# Altium PCB MGMEZZ04TEST.PCBDOC (part 1 of 2)
Units mil, origin at the board's own origin, x right, y up, seen from the top; angles counter-clockwise.
Board outline 4922.86 x 3627.76 mil, 6 copper layers (Top Layer, Internal Plane 1, Mid-Layer 1, Internal Plane 2, Mid-Layer 2, Bottom Layer); 10 components, 606 nets, 200 pads, 150 vias.
Unrouted connection lines stored in the file: 9.
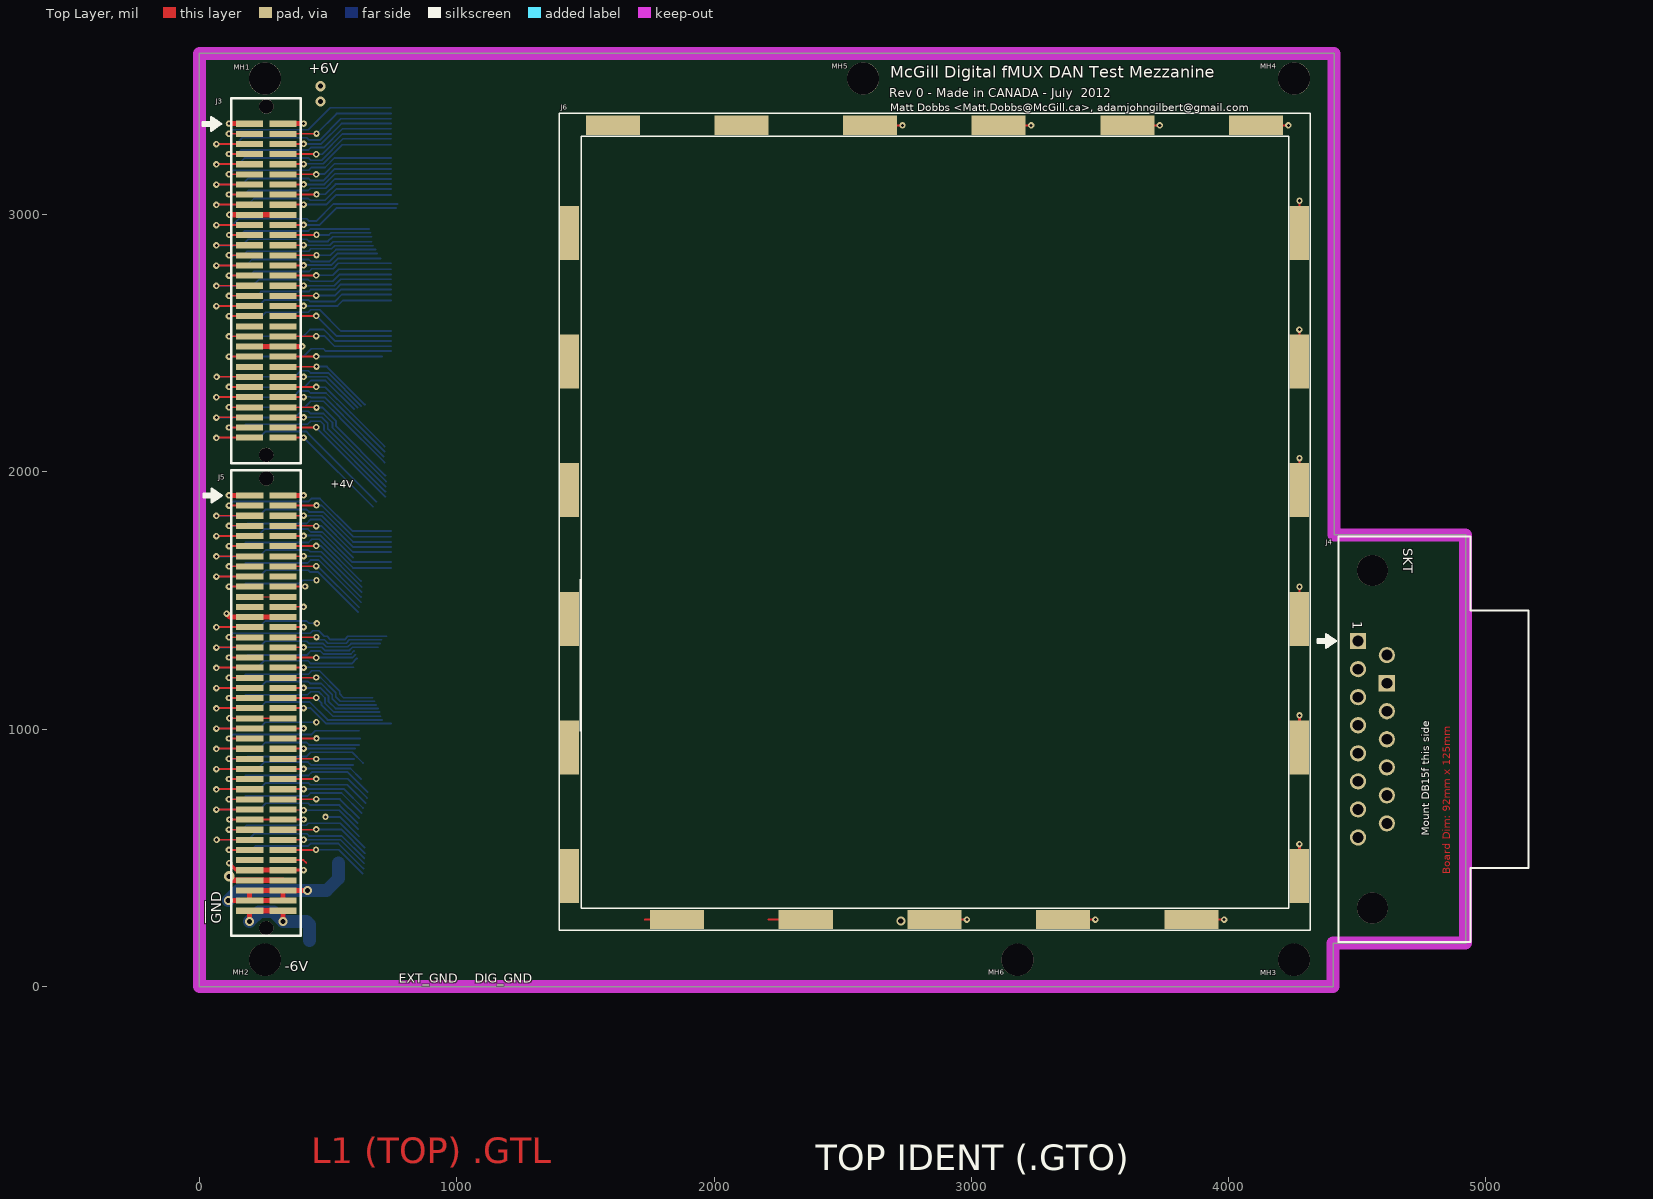
[diagram p0: Top Layer view]
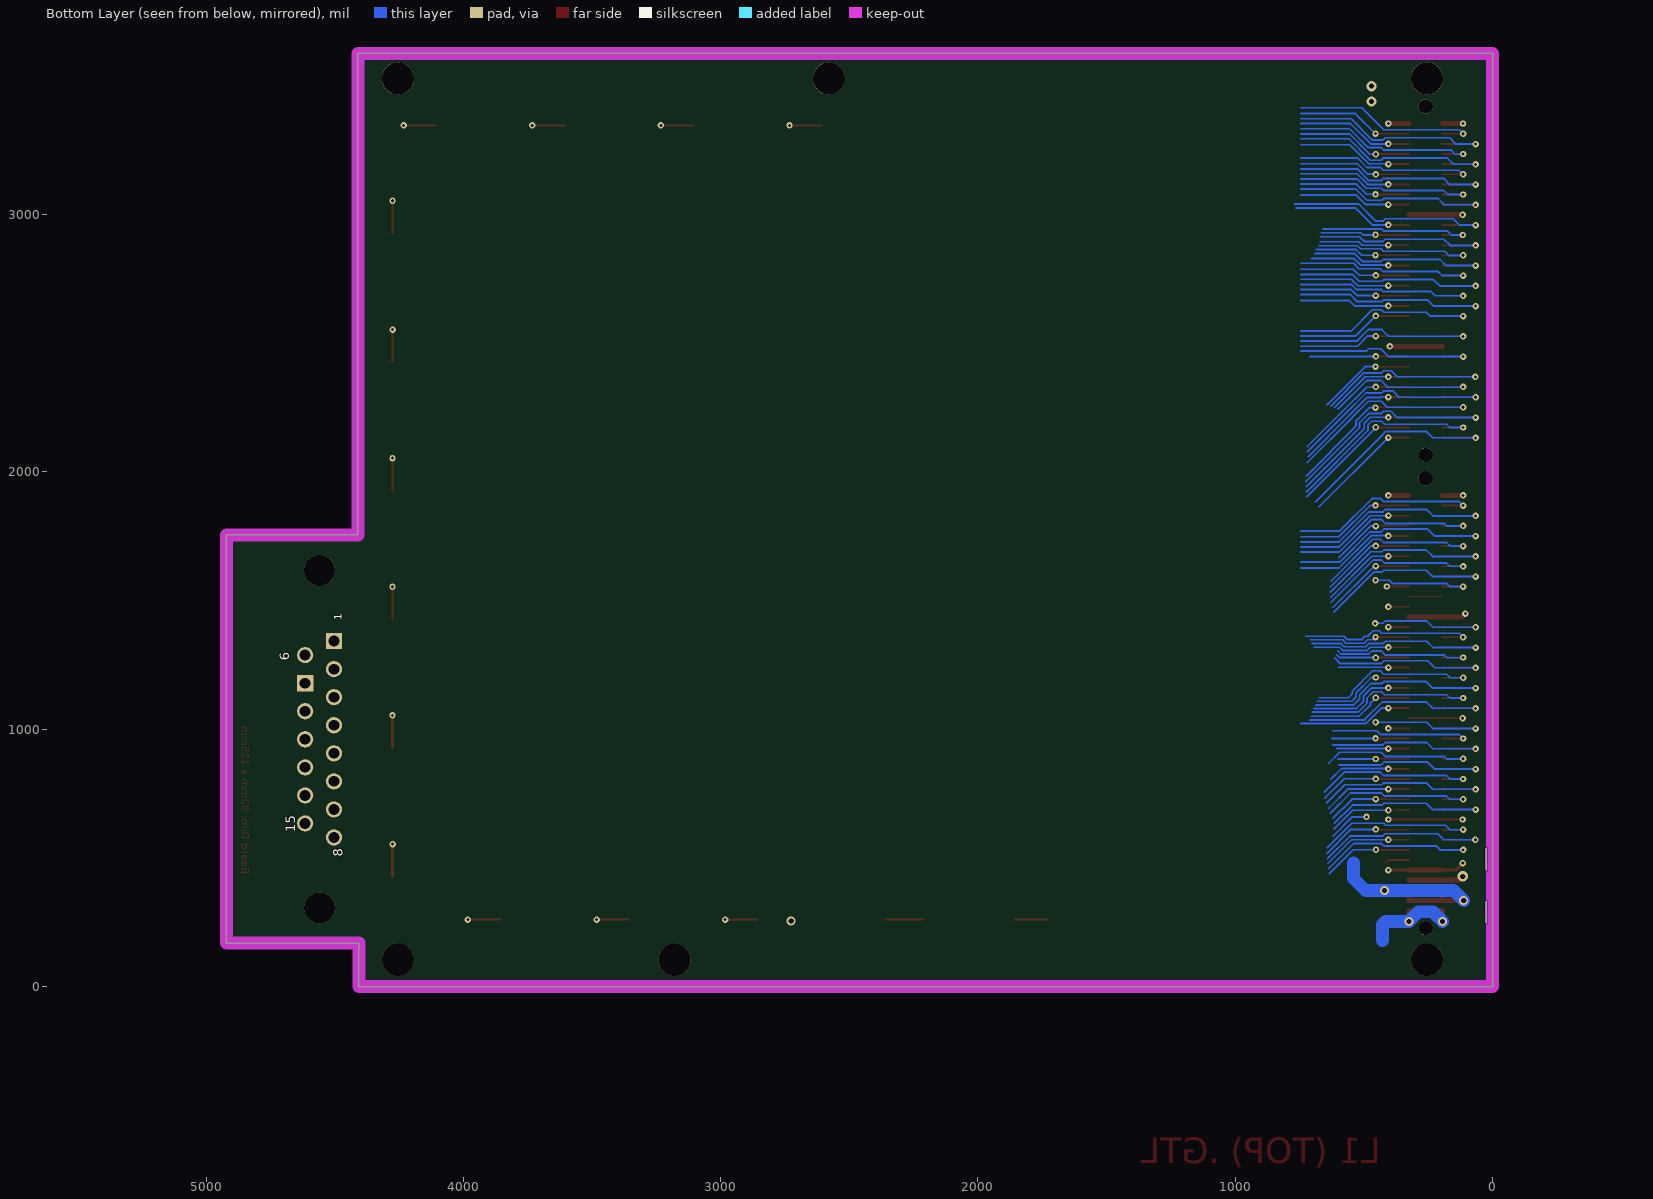
[diagram p1: Bottom Layer view, seen from below]
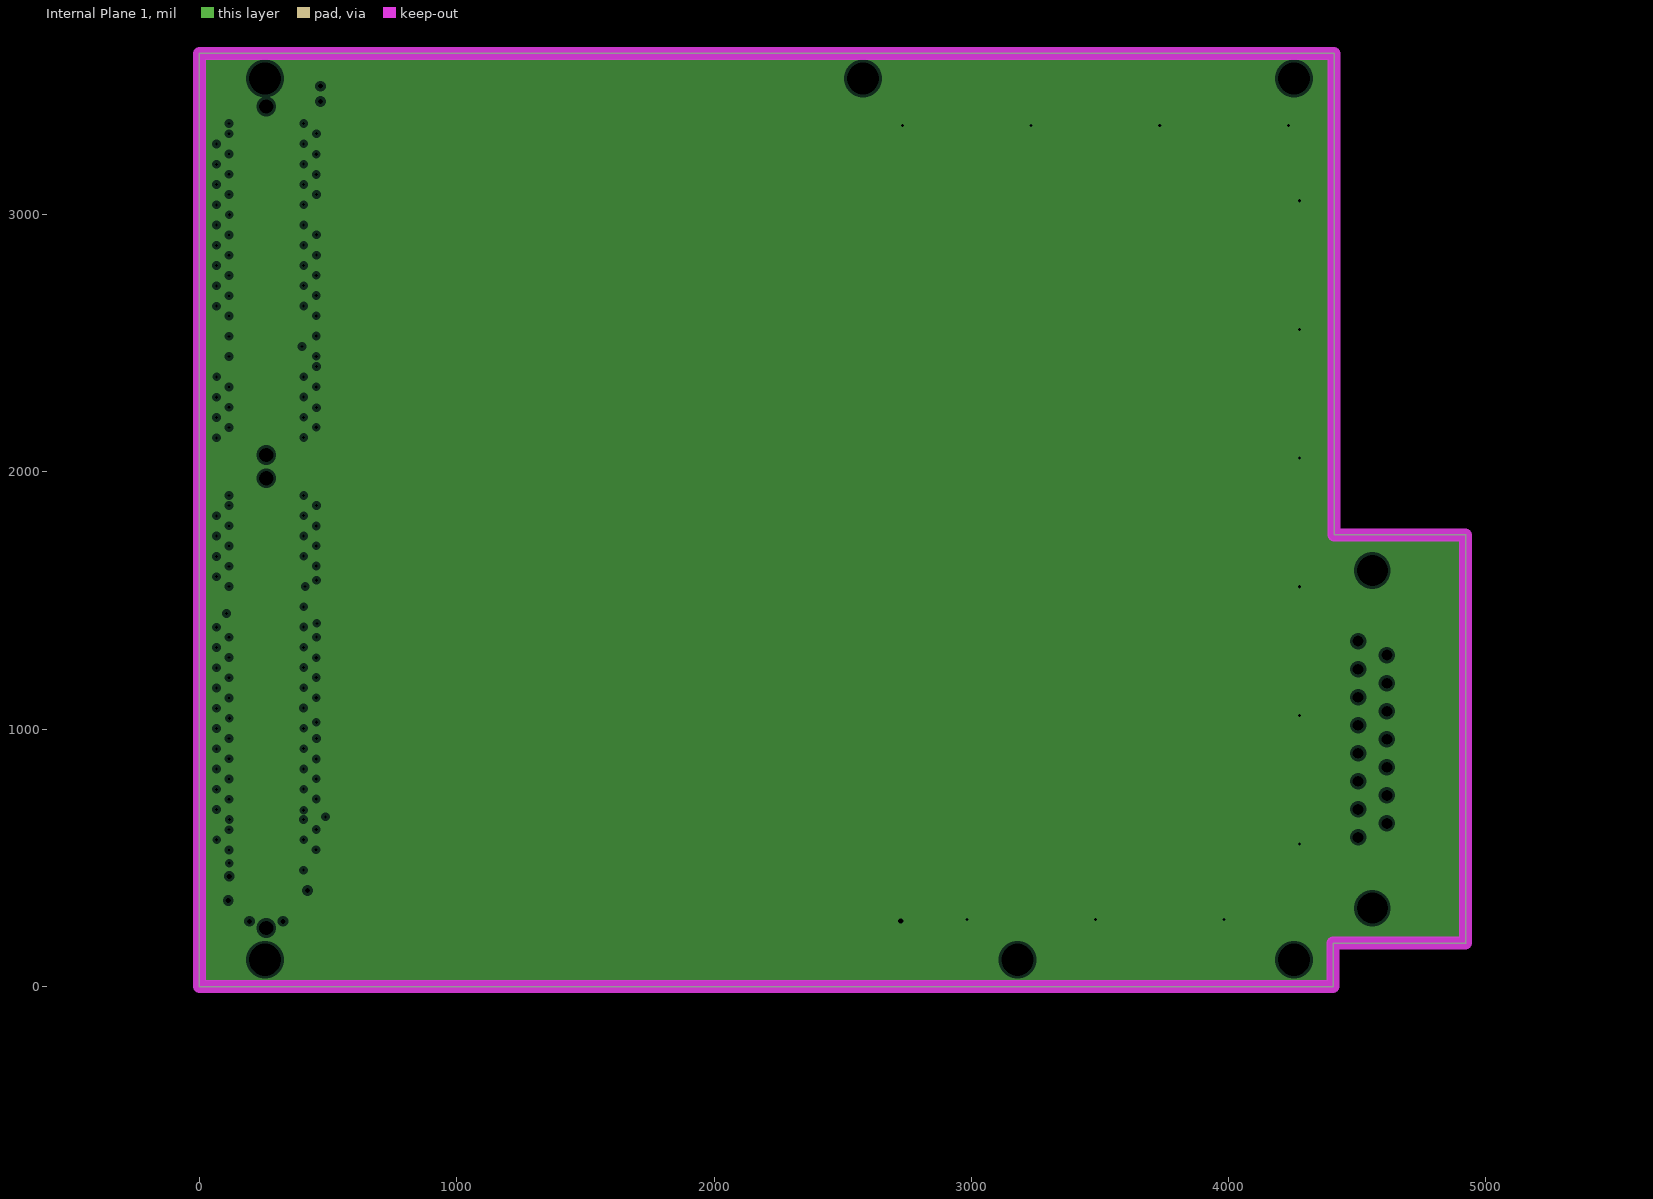
[diagram p2: Internal Plane 1, clearances drawn from the general rule]
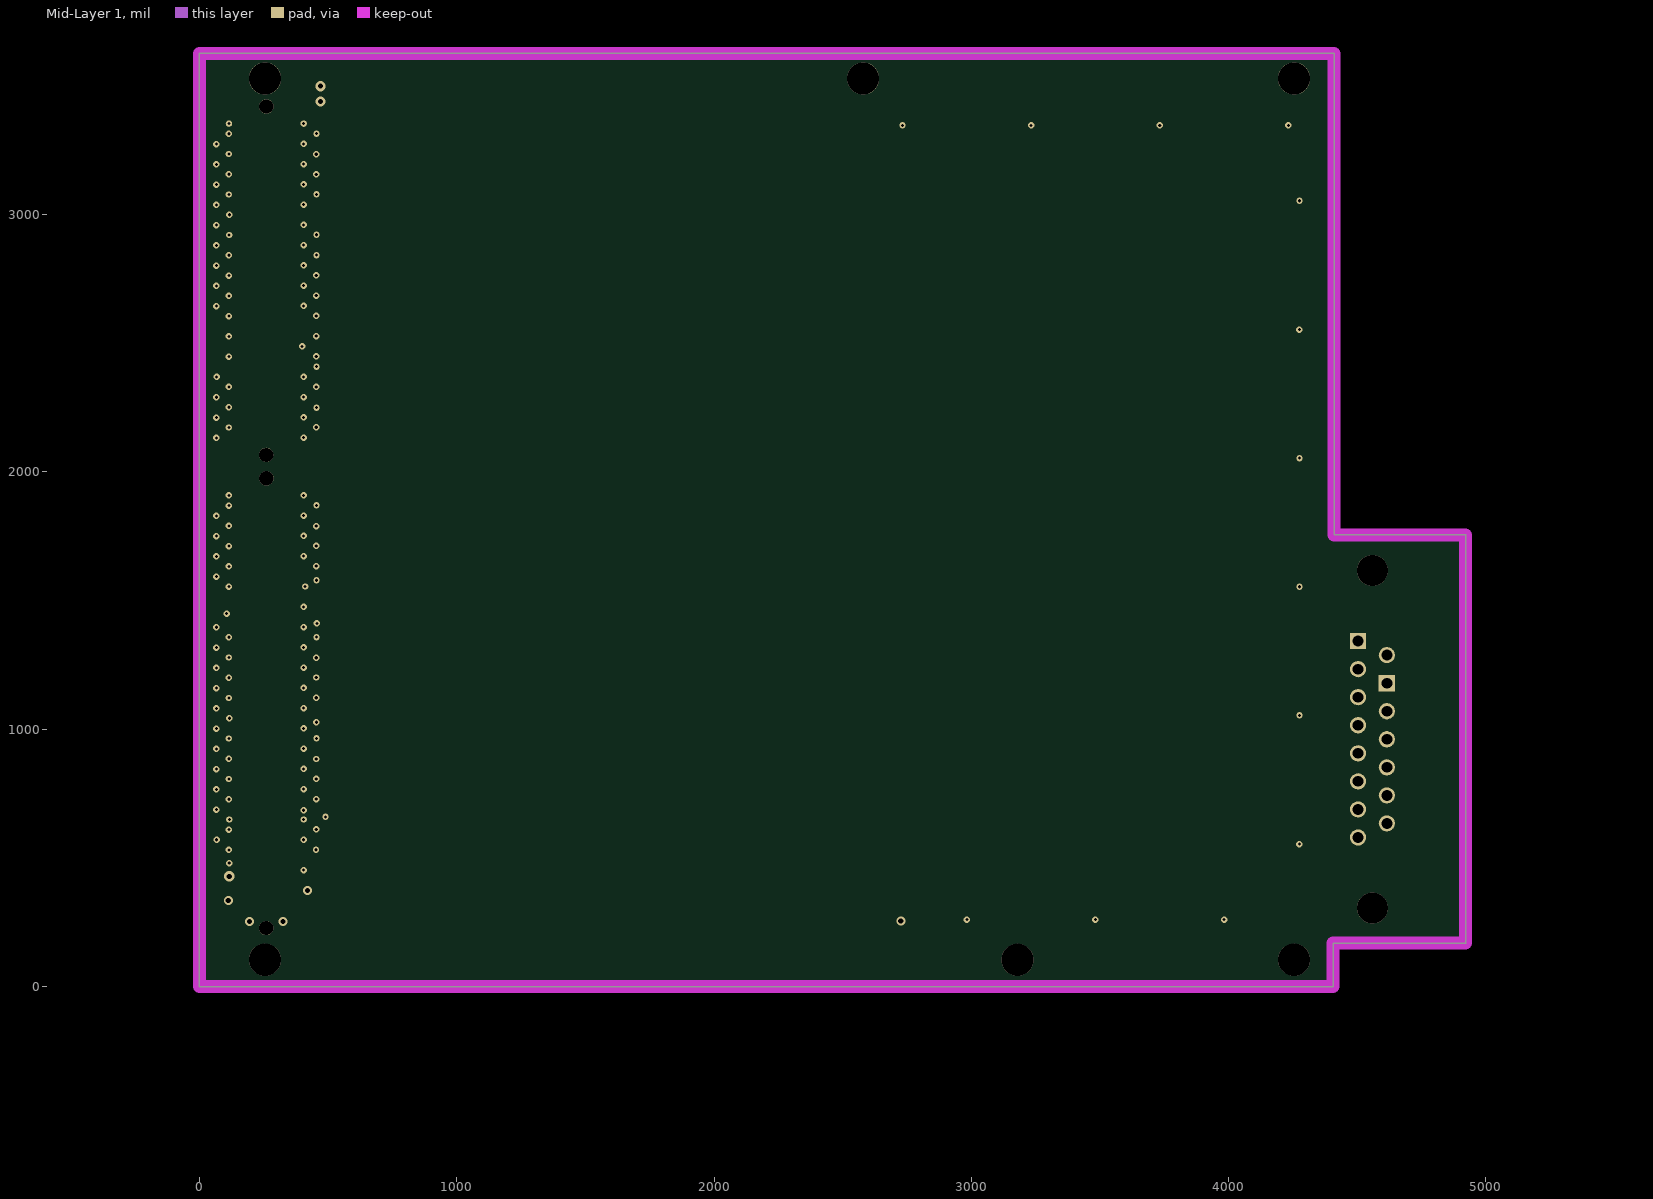
[diagram p3: Mid-Layer 1]
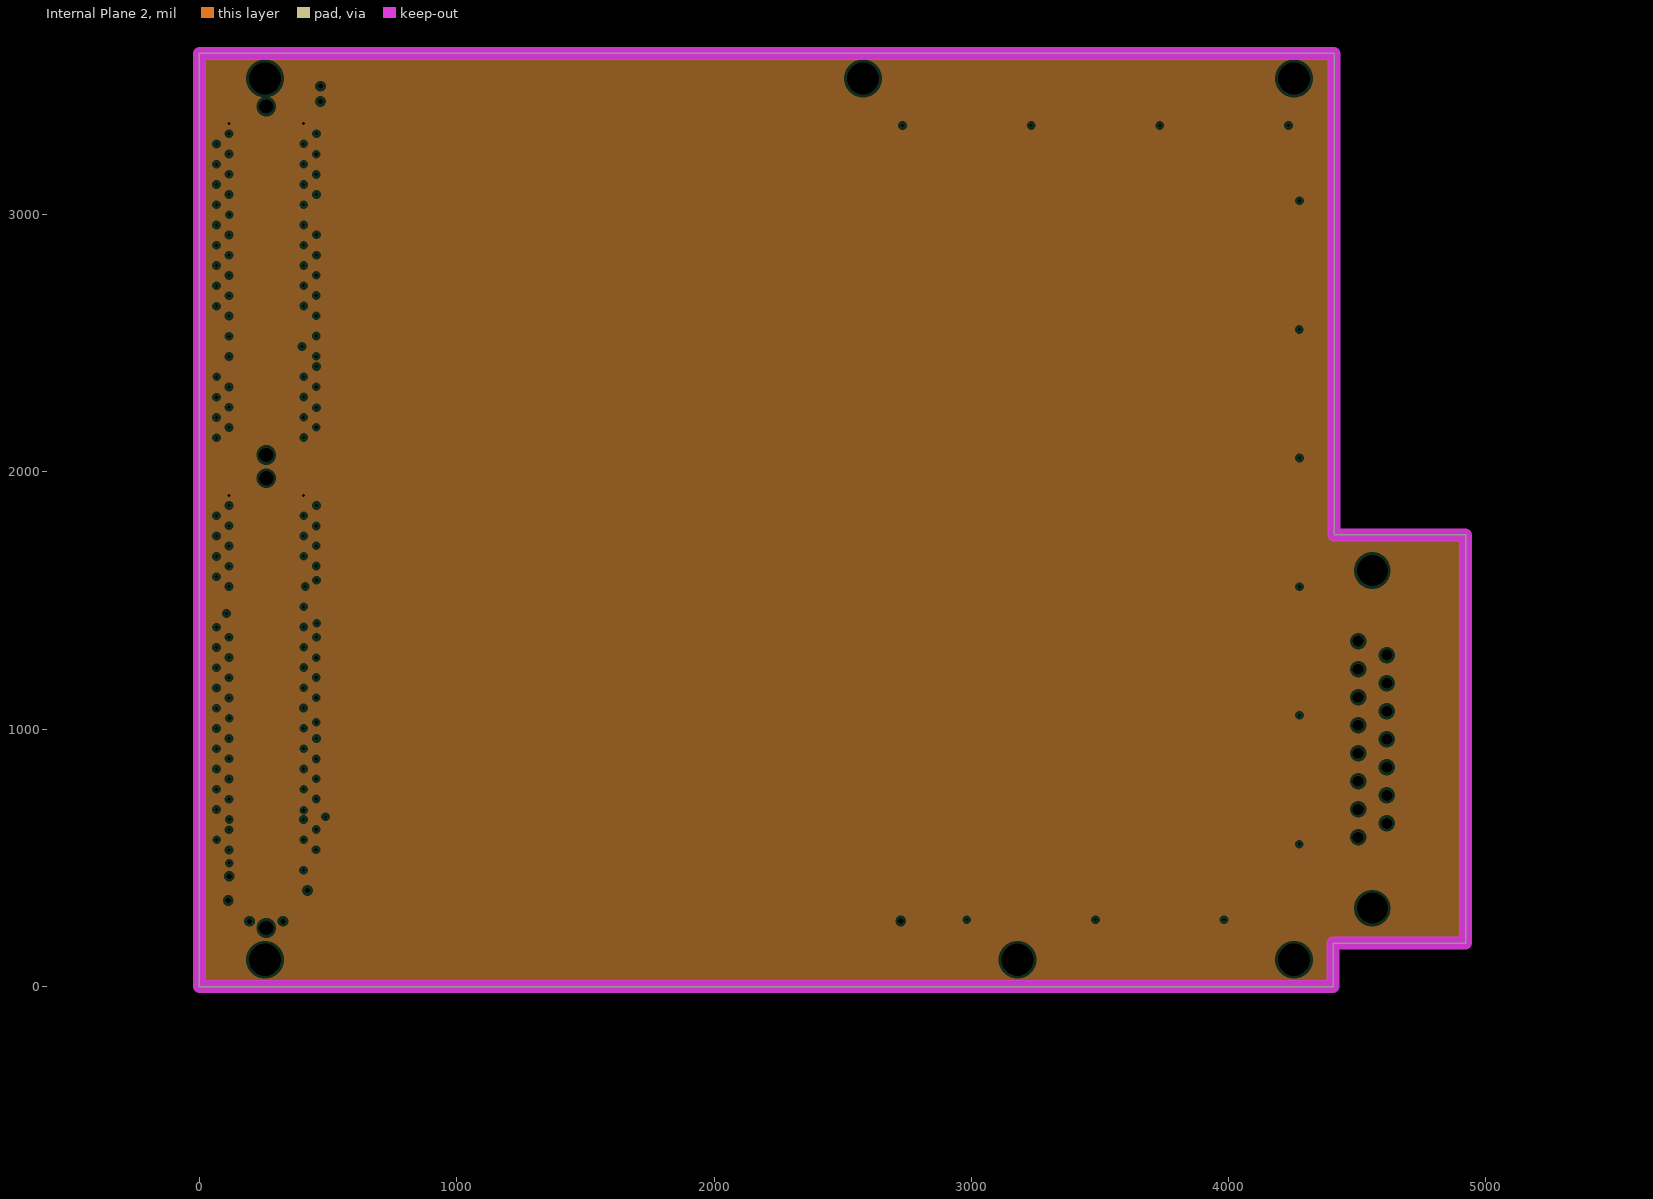
[diagram p4: Internal Plane 2, clearances drawn from the general rule]
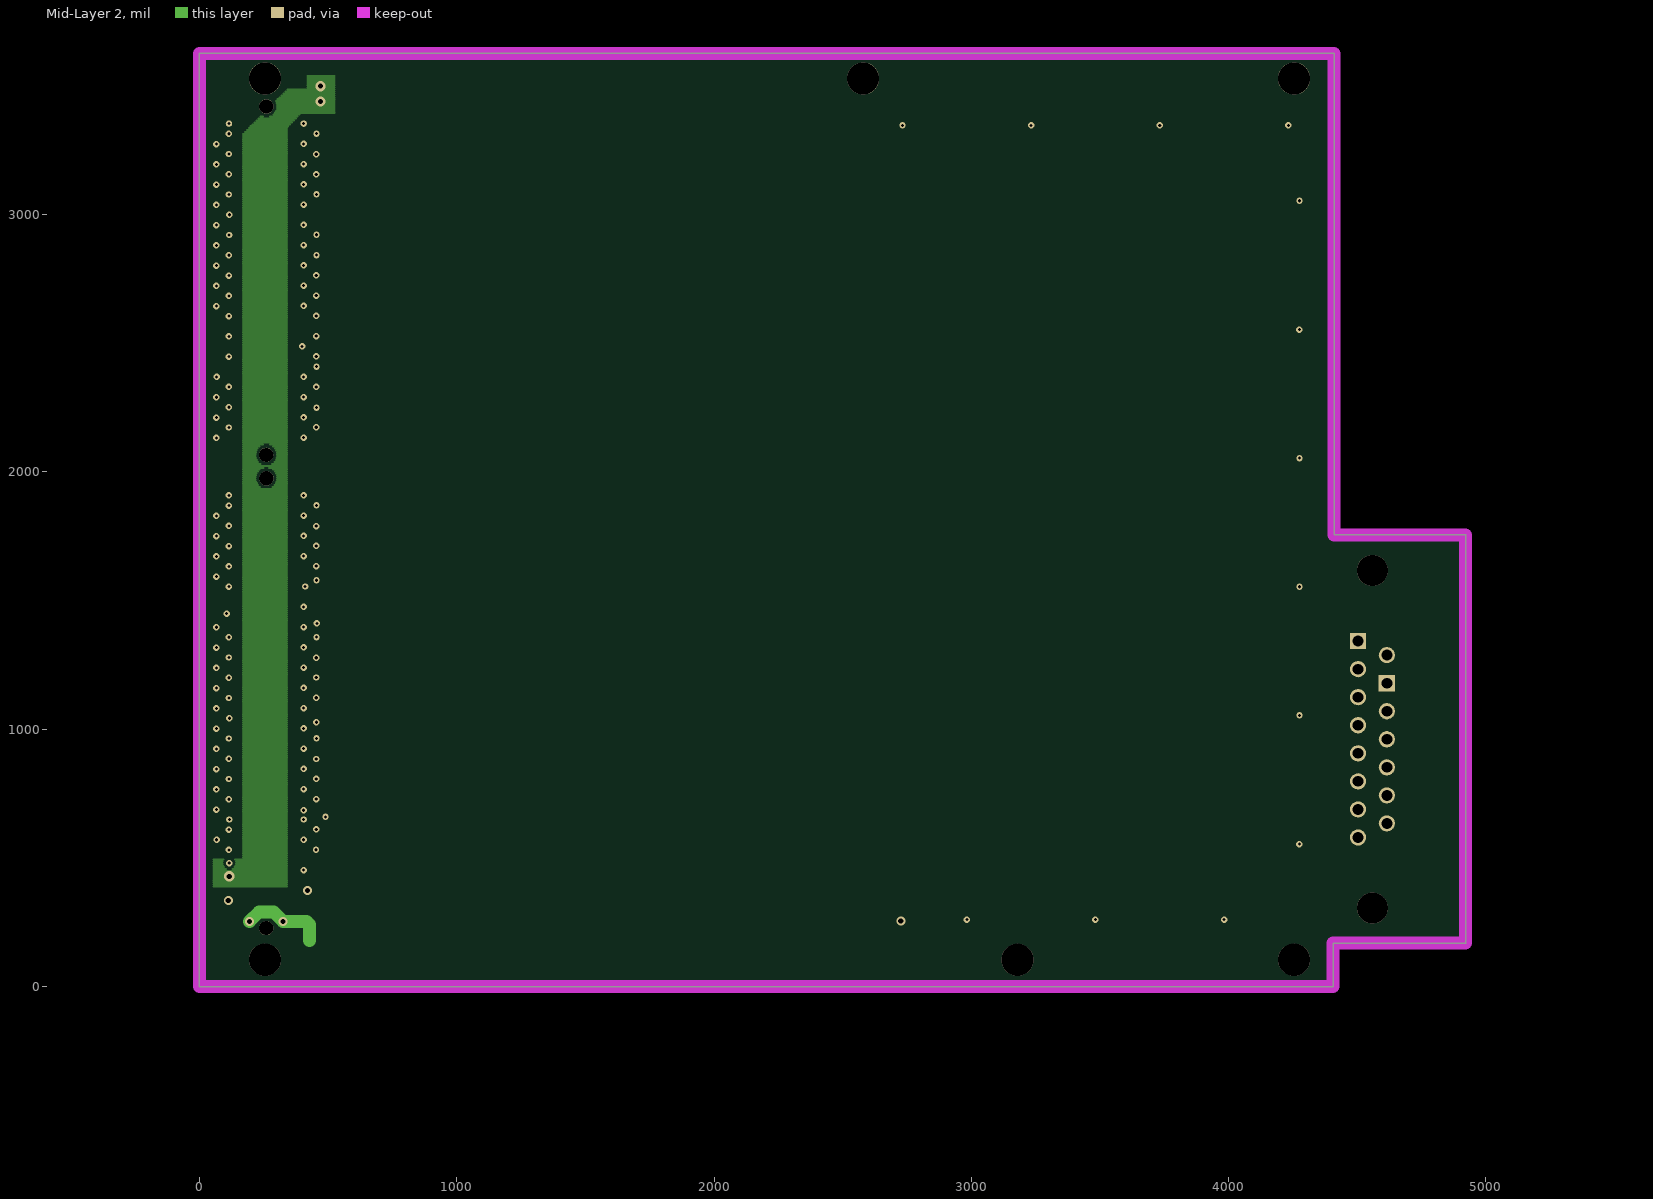
[diagram p5: Mid-Layer 2]

## Layer stack, top to bottom
Top Layer: signal copper 1.4
Dielectric: core 12.6, FR-4, Dk 4.8
Internal Plane 1: plane copper 1.4, net GND_SIGNAL
Dielectric: prepreg 12.6, FR-4, Dk 4.8
Mid-Layer 1: signal copper 1.4
Dielectric: core 12.6, FR-4, Dk 4.8
Internal Plane 2: plane copper 1.4, net (Multiple Nets)
Dielectric: prepreg 12.6, FR-4, Dk 4.8
Mid-Layer 2: signal copper 1.4
Dielectric: core 12.6, FR-4, Dk 4.8
Bottom Layer: signal copper 1.4

## Board outline
0,-1.02 cw(c0,0) -1.01,0 -1.01,3625.73 cw(c0,3625.73) 0,3626.75 4409.07,3626.75 cw(c4409.07,3625.73) 4410.08,3625.73 4410.08,1755.02 4920.83,1755.02 cw(c4920.83,1754) 4921.85,1754 4921.85,169 cw(c4920.83,169) 4920.83,167.98 4406.02,167.98 4406.02,0 cw(c4405,0) 4405,-1.02

## Design rules (kind name [scope] priority, off if disabled: settings)
Clearance Clearance_1 [(InPoly)] p1: gap=10
Clearance [All] p2: gap=6
ComponentClearance [All] p1 off: gap=10 collisioncheckmode=3 verticalgap=10 showdistances=FALSE
FabricationTestPointUsage TestPointUsage [All] p1: valid=0 allowmultiple=FALSE
FabricationTestpoint Testpoint [All] p1: side=3 testpointundercomponent=TRUE minsize=40 maxsize=100 preferedsize=60 minholesize=20 maxholesize=40 preferedholesize=32 testpointgrid=1 allowsidetop=TRUE allowsidebottom=TRUE usegrid=TRUE gridtolerance=0.01
HoleSize [All] p1: absolutevalues=TRUE maxlimit=250 minlimit=10 maxpercent=80.000 minpercent=20.000
PlaneClearance [All] p1: clearance=11
PlaneConnect PlaneConnect_1 [All] p1: planeconnectstyle=Direct reliefexpansion=20 reliefentries=4 reliefconductorwidth=10 reliefairgap=10
PlaneConnect [All] p2: planeconnectstyle=Relief reliefexpansion=20 reliefentries=4 reliefconductorwidth=10 reliefairgap=12
PolygonConnect [All] p1: connectstyle=Relief reliefconductorwidth=10 reliefentries=4 polygonreliefangle="90 Angle" airgapwidth=10
RoutingLayers [All] p1: top layer_v5=TRUE mid layer 1_v5=FALSE mid layer 2_v5=FALSE bottom layer_v5=TRUE
RoutingVias [All] p1: holewidth=12 width=25 viastyle="Through Hole" minholewidth=12 minwidth=22 maxholewidth=28 maxwidth=50
SilkscreenOverComponentPads [All] p1: minsilkscreentomaskgap=10
SolderMaskExpansion [All] p1: expansion=4
Width [All] p1: maxlimit=100 minlimit=2 preferedwidth=7
20 further rules are at their usual default settings.

## Classes and differential pairs
channel class DfMUX_Transceiver: transceiver_block1 transceiver_block2 transceiver_block3 transceiver_block4 transceiver_block5 transceiver_block6
channel class DfMUX_DAC: dac_block1 dac_block2 dac_block3 dac_block4
net class POWER_DATA[0..4]: POWER_DATA0 POWER_DATA1 POWER_DATA2 POWER_DATA3 POWER_DATA4

## Components (designator, comment, footprint, x,y, rotation, side; value= is the part's Value field where it differs from the comment)
J3 "IEEE1386 Amp120527-1 Plug 64pin" CON_AMP_1MM_64PINS 194.63,3353.43 r90 top
J4 "DB15_FEMALE" DSUB/RS.318/TM/15 4502.5,1342.5 r270 top locked
J5 "IEEE1386 Amp120527-2 Plug 84pin" CON_AMP_1MM_84PINS 194.63,1908.37 r90 top
J6 "Leader Tech 20S-CBSA-2.75x3.0x  SM RF Shield" "SHIELD 2.75X3.00" 4237.63,3309 r270 top locked
MH1 "mounting hole" MTHOLE.125 254.63,3529 r0 top
MH2 "mounting hole" MTHOLE.125 254.63,104 r0 top
MH3 "mounting hole" MTHOLE.125 4254.63,104 r0 top
MH4 "mounting hole" MTHOLE.125 4254.63,3529 r0 top
MH5 "mounting hole" MTHOLE.125 2579.63,3529 r0 top
MH6 "mounting hole" MTHOLE.125 3179.63,104 r0 top

## Footprints (in the part's own frame and the unit in brackets; to place one, negate y for a bottom-side part, rotate by r counter-clockwise, add the part's x,y. Pads: shape width x height; smd on the part's side, far side on the other; paste and mask are expansions set on the pad)
CON_AMP_1MM_64PINS [mil]
  rect 23.6x106.3 smd: 1(-0.4,0.18) 2(-0.4,-129.73) 3(-39.77,0.18) 4(-39.77,-129.73) 5(-79.13,0.18) 6(-79.13,-129.73) 7(-118.5,0.18) 8(-118.5,-129.73) 9(-157.87,0.18) 10(-157.87,-129.73) 11(-197.23,0.18) 12(-197.23,-129.73) 13(-236.6,0.18) 14(-236.6,-129.73) 15(-275.97,0.18) 16(-275.97,-129.73) 17(-315.33,0.18) 18(-315.33,-129.73) 19(-354.7,0.18) 20(-354.7,-129.73) 21(-394.07,0.18) 22(-394.07,-129.73) 23(-433.43,0.18) 24(-433.43,-129.73) 25(-472.8,0.18) 26(-472.8,-129.73) 27(-512.17,0.18) 28(-512.17,-129.73) 29(-551.53,0.18) 30(-551.53,-129.73) 31(-590.9,0.18) 32(-590.9,-129.73) 33(-630.27,0.18) 34(-630.27,-129.73) 35(-669.63,0.18) 36(-669.63,-129.73) 37(-709,0.18) 38(-709,-129.73) 39(-748.37,0.18) 40(-748.37,-129.73) 41(-787.73,0.18) 42(-787.73,-129.73) 43(-827.1,0.18) 44(-827.1,-129.73) 45(-866.47,0.18) 46(-866.47,-129.73) 47(-905.83,0.18) 48(-905.83,-129.73) 49(-945.2,0.18) 50(-945.2,-129.73) 51(-984.57,0.18) 52(-984.57,-129.73) 53(-1023.93,0.18) 54(-1023.93,-129.73) 55(-1063.3,0.18) 56(-1063.3,-129.73) 57(-1102.67,0.18) 58(-1102.67,-129.73) 59(-1142.03,0.18) 60(-1142.03,-129.73) 61(-1181.4,0.18) 62(-1181.4,-129.73) 63(-1220.77,0.18) 64(-1220.77,-129.73)
  round 56 hole 55 unplated: HOLE1(-1287.8,-64.72) HOLE2(66.52,-64.77)
  silkscreen extent -1320,-198 98,71
CON_AMP_1MM_84PINS [mil]
  rect 23.6x106.3 smd: 1(-0.4,0.12) 2(-0.4,-129.8) 3(-39.77,0.12) 4(-39.77,-129.8) 5(-79.13,0.12) 6(-79.13,-129.8) 7(-118.5,0.12) 8(-118.5,-129.8) 9(-157.87,0.12) 10(-157.87,-129.8) 11(-197.23,0.12) 12(-197.23,-129.8) 13(-236.6,0.12) 14(-236.6,-129.8) 15(-275.97,0.12) 16(-275.97,-129.8) 17(-315.33,0.12) 18(-315.33,-129.8) 19(-354.7,0.12) 20(-354.7,-129.8) 21(-394.07,0.12) 22(-394.07,-129.8) 23(-433.43,0.12) 24(-433.43,-129.8) 25(-472.8,0.12) 26(-472.8,-129.8) 27(-512.17,0.12) 28(-512.17,-129.8) 29(-551.53,0.12) 30(-551.53,-129.8) 31(-590.9,0.12) 32(-590.9,-129.8) 33(-630.27,0.12) 34(-630.27,-129.8) 35(-669.63,0.12) 36(-669.63,-129.8) 37(-709,0.12) 38(-709,-129.8) 39(-748.37,0.12) 40(-748.37,-129.8) 41(-787.73,0.12) 42(-787.73,-129.8) 43(-827.1,0.12) 44(-827.1,-129.8) 45(-866.47,0.12) 46(-866.47,-129.8) 47(-905.83,0.12) 48(-905.83,-129.8) 49(-945.2,0.12) 50(-945.2,-129.8) 51(-984.57,0.12) 52(-984.57,-129.8) 53(-1023.93,0.12) 54(-1023.93,-129.8) 55(-1063.3,0.12) 56(-1063.3,-129.8) 57(-1102.67,0.12) 58(-1102.67,-129.8) 59(-1142.03,0.12) 60(-1142.03,-129.8) 61(-1181.4,0.12) 62(-1181.4,-129.8) 63(-1220.77,0.12) 64(-1220.77,-129.8) 65(-1260.13,0.12) 66(-1260.13,-129.8) 67(-1299.5,0.12) 68(-1299.5,-129.8) 69(-1338.87,0.12) 70(-1338.87,-129.8) 71(-1378.23,0.12) 72(-1378.23,-129.8) 73(-1417.6,0.12) 74(-1417.6,-129.8) 75(-1456.97,0.12) 76(-1456.97,-129.8) 77(-1496.33,0.12) 78(-1496.33,-129.8) 79(-1535.7,0.12) 80(-1535.7,-129.8) 81(-1575.07,0.12) 82(-1575.07,-129.8) 83(-1614.43,0.12) 84(-1614.43,-129.8)
  round 56 hole 55 unplated: HOLE1(-1681.5,-64.83) HOLE2(66.52,-64.83)
  silkscreen extent -1711,-199 98,71
DSUB/RS.318/TM/15 [mil]
  rect 63x63 hole 42: 1(0.47,0.25) 10(163.97,112.25)
  round 63 hole 42: 2(109.47,0.25) 3(218.47,0.25) 4(327.47,0.25) 5(436.47,0.25) 6(545.47,0.25) 7(654.47,0.25) 8(763.47,0.25) 9(54.97,112.25) 11(272.97,112.25) 12(381.97,112.25) 13(490.97,112.25) 14(599.97,112.25) 15(708.97,112.25)
  round 120 hole 120: Hole29(1037.97,56.25) Hole30(-274.03,56.25)
  silkscreen extent -406,-75 1169,662
MTHOLE.125 [mil]
  round 125 hole 125 unplated: 1(-0.4,-0.25)
"SHIELD 2.75X3.00" [mil]
  rect 210x75 smd: 1(380.2,37) 2(880.2,37) 3(1380.2,37) 4(1880.2,37) 5(2380.2,37) 6(2880.2,37) 12(2880.2,-2800) 13(2380.2,-2800) 14(1880.2,-2800) 15(1380.2,-2800) 16(880.2,-2800) 17(380.2,-2800)
  rect 75x210 smd: 7(3048.7,-381.5) 8(3048.7,-881.5) 9(3048.7,-1381.5) 10(3048.7,-1881.5) 11(3048.7,-2381.5) 18(-38.3,-2631.5) 19(-38.3,-2131.5) 20(-38.3,-1631.5) 21(-38.3,-1131.5) 22(-38.3,-631.5) 23(-38.3,-131.5)

## Part data
J5: library part "IEEE1386 Amp120527-2 Plug84pin"
J6: library part "CONN FLEX 23"
MH1 MH2 MH3 MH4 MH5 MH6: library part SOUNDER_0

## Free pads (board coordinates)
  round 25 hole 12: 1(114.33,3353.43) 1(404.85,3353.43)

## Via types
v1: diameter 25, hole 12, Top Layer to Bottom Layer, 142 vias
v2: diameter 35, hole 20, Top Layer to Bottom Layer, 5 vias
v3: diameter 40, hole 20, Top Layer to Bottom Layer, 3 vias

## Nets (pads, with @x,y where several pads share a name; then routed paths per layer and width w, separated by ;. In a path a pad name is that pad's centre, name@x,y a point inside that pad or via, vN(x,y) a via of type N, cw(c..) or ccw(c..) an arc to the next point about the centre after c; other vN are vias at no path point)
A_DATA15_transceiver_block5: 
A_DATA15_transceiver_block6: 
ADCCLOCK: 
B_DATA15_transceiver_block5: 
B_DATA15_transceiver_block6: 
CLOCK_IN1: J3.43 | length 739.8
  Top Layer w7: v1(114.33,2526.73) 194.45,2526.73 J3.43@194.63,2526.73
  Bottom Layer w7: v1(114.33,2526.73) 403,2526.73 419.63,2542.37 429.63,2553.37 482.63,2553.37 527.63,2508.37 744.13,2508.37
CLOCK_IN2: J3.44 | length 437.5
  Top Layer w7: J3.44@324.55,2526.73 452.87,2526.73 v1(453.63,2527.5)
  Bottom Layer w7: v1(453.63,2527.5) 453.63,2528 454.63,2528 454.63,2528.5 484.5,2528.5 524.63,2488.37 744.13,2488.37
COMB1_DATA0: J5.49 | length 598.2
  Top Layer w7: v1(114.33,963.57) 194.52,963.57 J5.49@194.63,963.57
  Bottom Layer w7: v1(114.33,963.57) 129.63,978.87 434.5,978.87 449.63,994 619.63,994
COMB1_DATA1: J5.50 | length 300.3
  Top Layer w7: J5.50@324.55,963.57 453.33,963.57 453.63,963.87 v1(454.63,963.87)
  Bottom Layer w7: v1(454.63,963.87) 624.77,963.87
COMB1_DATA2: J5.51 | length 697.2
  Top Layer w7: v1(65.55,923.43) 66.32,924.2 194.52,924.2 J5.51@194.63,924.2
  Bottom Layer w7: v1(65.55,923.43) 231.2,923.43 255.63,947.87 416.63,947.87 425.63,938.87 619.5,938.87
COMB1_DATA3: J5.52 | length 279.9
  Top Layer w7: J5.52@324.55,924.2 v1(404.85,924.2)
  Bottom Layer w7: v1(404.85,924.2) 604.43,924.2
COMB1_DATA4: J5.53 | length 629.6
  Top Layer w7: v1(114.33,884.83) 194.52,884.83 J5.53@194.63,884.83
  Bottom Layer w7: v1(114.33,884.83) 115.3,883.87 176.63,883.87 186.63,893.87 416.63,893.87 432.63,909.87 593.77,909.87 635.27,868.37
COMB1_DATA5: J5.54 | length 275.6
  Top Layer w7: J5.54@324.55,884.83 452.67,884.83 v1(453.63,883.87)
  Bottom Layer w7: v1(453.63,883.87) 599.77,883.87
COMB1_DATA6: J5.55 | length 677.4
  Top Layer w7: v1(65.55,844.7) 66.32,845.47 194.52,845.47 J5.55@194.63,845.47
  Bottom Layer w7: v1(65.55,844.7) 224.47,844.7 251.63,871.87 421.63,871.87 432.63,860.87 597.77,860.87
COMB1_DATA7: J5.56 | length 320
  Top Layer w7: J5.56@324.55,845.47 v1(404.85,845.47)
  Bottom Layer w7: v1(404.85,845.47) 406.45,846.87 586.77,846.87 627.27,806.37
COMB1_DATA8: J5.57 | length 662.6
  Top Layer w7: v1(114.33,806.1) 194.52,806.1 J5.57@194.63,806.1
  Bottom Layer w7: v1(114.33,806.1) 114.57,805.87 164.63,805.87 178.63,819.87 423.63,819.87 436.63,832.87 575.77,832.87 653.27,755.37
COMB1_DATA9: J5.58 | length 357.9
  Top Layer w7: J5.58@324.55,806.1 452.87,806.1 v1(453.63,806.87)
  Bottom Layer w7: v1(453.63,806.87) 576.77,806.87 651.27,732.37
COMB1_DATA10: J5.59 | length 752.9
  Top Layer w7: v1(65.55,765.97) 66.32,766.73 194.52,766.73 J5.59@194.63,766.73
  Bottom Layer w7: v1(65.55,765.97) 232.73,765.97 257.63,790.87 422.63,790.87 429.63,783.87 574.77,783.87 646.27,712.37
COMB1_DATA11: J5.60 | length 341.1
  Top Layer w7: J5.60@324.55,766.73 v1(404.85,766.73)
  Bottom Layer w7: v1(404.85,766.73) 561.9,766.73 635.27,693.37
COMB1_DATA12: J5.61 | length 638.9
  Top Layer w7: v1(114.33,727.37) 194.52,727.37 J5.61@194.63,727.37
  Bottom Layer w7: v1(114.33,727.37) 166.13,727.37 178.63,739.87 419.63,739.87 431.63,751.87 551.77,751.87 630.27,673.37
COMB1_DATA13: J5.62 | length 327
  Top Layer w7: J5.62@324.55,727.37 452.87,727.37 v1(453.63,728.13)
  Bottom Layer w7: v1(453.63,728.13) 545.5,728.13 620.27,653.37
COMB1_DATA14: J5.63 | length 720.4
  Top Layer w7: v1(65.55,687.23) 66.32,688 194.52,688 J5.63@194.63,688
  Bottom Layer w7: v1(65.55,687.23) 232,687.23 256.63,711.87 422.63,711.87 429.63,704.87 543.77,704.87 614.27,634.37
COMB1_DATA15: J5.64 | length 322.2
  Top Layer w7: J5.64@324.55,688 v1(404.85,684.73)
  Bottom Layer w7: v1(404.85,684.73) 542.9,684.73 616.27,611.37
COMB2_DATA0: J5.29 | length 723.6
  Top Layer w7: v1(114.33,1357.23) 194.52,1357.23 J5.29@194.63,1357.23
  Bottom Layer w7: v1(114.33,1357.23) 129.63,1372.53 429.8,1372.53 439.63,1382.37 463.27,1382.37 484.63,1361 495.63,1361 508.63,1348 563.63,1348 576.63,1361 727.63,1361
COMB2_DATA1: J5.30 | length 397.3
  Top Layer w7: J5.30@324.55,1357.23 453.33,1357.23 453.63,1357.53 v1(454.63,1357.53)
  Bottom Layer w7: v1(454.63,1357.53) 455.1,1357.53 465.63,1347 485.63,1347 498.63,1334 569.63,1334 582.63,1347 706.63,1347
COMB2_DATA2: J5.31 | length 789.2
  Top Layer w7: v1(65.55,1317.1) 66.32,1317.87 194.52,1317.87 J5.31@194.63,1317.87
  Bottom Layer w7: v1(65.55,1317.1) 231.2,1317.1 255.63,1341.53 416.63,1341.53 425.63,1332.53 480.1,1332.53 492.63,1320 576.63,1320 589.17,1332.53 701.1,1332.53
COMB2_DATA3: J5.32 | length 379.9
  Top Layer w7: J5.32@324.55,1317.87 v1(404.85,1317.87)
  Bottom Layer w7: v1(404.85,1317.87) 474.77,1317.87 486.63,1306 582.63,1306 594.5,1317.87 694.63,1317.87
COMB2_DATA4: J5.33 | length 586.9
  Top Layer w7: v1(114.33,1278.5) 194.52,1278.5 J5.33@194.63,1278.5
  Bottom Layer w7: v1(114.33,1278.5) 115.3,1277.53 176.63,1277.53 186.63,1287.53 416.63,1287.53 432.63,1303.53 469.1,1303.53 480.63,1292 588.63,1292 600.17,1303.53
COMB2_DATA5: J5.34 | length 286.2
  Top Layer w7: J5.34@324.55,1278.5 452.67,1278.5 v1(453.63,1277.53)
  Bottom Layer w7: v1(453.63,1277.53) 454.1,1278 594.63,1278 605.63,1289
COMB2_DATA6: J5.35 | length 699.8
  Top Layer w7: v1(65.55,1238.37) 66.32,1239.13 194.52,1239.13 J5.35@194.63,1239.13
  Bottom Layer w7: v1(65.55,1238.37) 224.47,1238.37 251.63,1265.53 421.63,1265.53 432.63,1254.53 591.17,1254.53 611.63,1275
COMB2_DATA7: J5.36 | length 275.1
  Top Layer w7: J5.36@324.55,1239.13 v1(404.85,1239.13)
  Bottom Layer w7: v1(404.85,1239.13) 406.45,1240.53 599.17,1240.53
COMB2_DATA8: J5.37 | length 699.6
  Top Layer w7: v1(114.33,1199.77) 194.52,1199.77 J5.37@194.63,1199.77
  Bottom Layer w7: v1(114.33,1199.77) 114.57,1199.53 164.63,1199.53 178.63,1213.53 423.63,1213.53 436.63,1226.53 466.1,1226.53 544.63,1148 544.63,1137 559.63,1122 672.63,1122
COMB2_DATA9: J5.38 | length 402.5
  Top Layer w7: J5.38@324.55,1199.77 452.87,1199.77 v1(453.63,1200.53)
  Bottom Layer w7: v1(453.63,1200.53) 470.1,1200.53 529.63,1141 529.63,1126 547.63,1108 679.63,1108
COMB2_DATA10: J5.39 | length 807.7
  Top Layer w7: v1(65.55,1159.63) 66.32,1160.4 194.52,1160.4 J5.39@194.63,1160.4
  Bottom Layer w7: v1(65.55,1159.63) 232.73,1159.63 257.63,1184.53 422.63,1184.53 429.63,1177.53 472.1,1177.53 515.63,1134 515.63,1118 539.63,1094 686.63,1094
COMB2_DATA11: J5.40 | length 414.7
  Top Layer w7: J5.40@324.55,1160.4 v1(404.85,1160.4)
  Bottom Layer w7: v1(404.85,1160.4) 469.23,1160.4 501.63,1128 501.63,1107 528.63,1080 693.63,1080
COMB2_DATA12: J5.41 | length 720.4
  Top Layer w7: v1(114.33,1121.03) 194.52,1121.03 J5.41@194.63,1121.03
  Bottom Layer w7: v1(114.33,1121.03) 166.13,1121.03 178.63,1133.53 419.63,1133.53 431.63,1145.53 463.1,1145.53 487.63,1121 487.63,1101 522.63,1066 699.63,1066
COMB2_DATA13: J5.42 | length 413.2
  Top Layer w7: J5.42@324.55,1121.03 452.87,1121.03 v1(453.63,1121.8)
  Bottom Layer w7: v1(453.63,1121.8) 453.83,1121.8 473.63,1102 473.63,1095 518.63,1050 703.63,1050
COMB2_DATA14: J5.43 | length 812.5
  Top Layer w7: v1(65.55,1080.9) 66.32,1081.67 194.52,1081.67 J5.43@194.63,1081.67
  Bottom Layer w7: v1(65.55,1080.9) 232,1080.9 256.63,1105.53 428.1,1105.53 497.63,1036 709.63,1036
COMB2_DATA15: J5.44 | length 444.6
  Top Layer w7: J5.44@324.55,1081.67 v1(404.33,1081.67)
  Bottom Layer w7: v1(404.33,1081.67) 431.97,1081.67 492.27,1021.37 744.13,1021.37
COMB3_DATA0: J3.23 | length 638.5
  Top Layer w7: v1(114.67,2920.4) 194.45,2920.4 J3.23@194.63,2920.4
  Bottom Layer w7: v1@112.03,2918 v1(114.67,2920.4) ; v1@114.7,2920.37 159.63,2920.37 175.63,2936.37 423.3,2936.37 431.3,2944.37 659.63,2944.37
COMB3_DATA1: J3.24 | length 346.5
  Top Layer w7: J3.24@324.55,2920.4 453.33,2920.4 v1@453.63,2920.7 ; v1@453.63,2920.7 453.63,2921.37 v1(454.63,2921.37) 454.63,2920.7 v1@453.63,2920.7
  Bottom Layer w7: v1(454.63,2921.37) 455.63,2920.37 502.63,2920.37 503.3,2920.7 511.6,2929 664.63,2929
COMB3_DATA2: J3.25 | length 754.6
  Top Layer w7: v1(65.55,2880.27) 66.32,2881.03 194.45,2881.03 J3.25@194.63,2881.03
  Bottom Layer w7: v1(65.55,2880.27) 164.53,2880.27 188.63,2904.37 416.97,2904.37 425.63,2895.7 498.97,2895.7 517.27,2914 669.63,2914
COMB3_DATA3: J3.26 | length 350.5
  Top Layer w7: J3.26@324.55,2881.03 v1(404.85,2881.03)
  Bottom Layer w7: v1(404.85,2881.03) 506.3,2881.03 519.27,2894 669.63,2894
COMB3_DATA4: J3.27 | length 656.9
  Top Layer w7: v1(114.33,2841.67) 194.45,2841.67 J3.27@194.63,2841.67
  Bottom Layer w7: v1(114.33,2841.67) 115.3,2840.7 168.73,2840.7 185.73,2857.37 423.63,2857.37 432.63,2866.7 512.97,2866.7 525.27,2879 674.63,2879
COMB3_DATA5: J3.28 | length 501.9
  Top Layer w7: J3.28@324.55,2841.67 453.97,2841.67 v1(454.63,2842) 324.88,2842 J3.28@324.55,2841.67
  Bottom Layer w7: v1@454,2841.37 v1@454.3,2841.67 ; 684.63,2864 530.27,2864 507.93,2841.67 454.63,2841.67 v1@454.3,2841.67 ; v1@454.3,2841.67 453.97,2841.67 v1(454.63,2842) v1@454.3,2841.67
COMB3_DATA6: J3.29 | length 779.3
  Top Layer w7: v1(65.55,2801.53) 66.32,2802.3 194.45,2802.3 J3.29@194.63,2802.3
  Bottom Layer w7: v1(65.55,2801.53) 179.65,2801.53 203.82,2825.37 424.63,2825.37 432.63,2817.7 505.97,2817.7 537.27,2849 689.63,2849
COMB3_DATA7: J3.30 | length 391.1
  Top Layer w7: J3.30@324.55,2802.3 v1(404.85,2802.3)
  Bottom Layer w7: v1(404.85,2802.3) 406.45,2803.7 511.97,2803.7 537.27,2829 704.63,2829
COMB3_DATA8: J3.31 | length 729.8
  Top Layer w7: v1(114.33,2762.93) 194.45,2762.93 J3.31@194.63,2762.93
  Bottom Layer w7: v1(114.33,2762.93) 114.57,2762.7 195.97,2762.7 210.97,2777.37 211.97,2778.37 425.3,2778.37 436.63,2789.7 518.97,2789.7 539.63,2810.37 744.13,2810.37
COMB3_DATA9: J3.32 | length 429.7
  Top Layer w7: J3.32@324.55,2762.93 452.87,2762.93 v1(453.63,2763.7)
  Bottom Layer w7: v1(453.63,2763.7) 516.97,2763.7 540.63,2787.37 744.13,2787.37
COMB3_DATA10: J3.33 | length 831.8
  Top Layer w7: v1(65.55,2722.8) 66.32,2723.57 194.45,2723.57 J3.33@194.63,2723.57
  Bottom Layer w7: v1(65.55,2722.8) 204.9,2722.8 229.8,2747.37 422.63,2747.37 429.63,2740.7 517.97,2740.7 544.63,2767.37 744.13,2767.37
COMB3_DATA11: J3.34 | length 429.9
  Top Layer w7: J3.34@324.55,2723.57 v1(404.85,2723.57)
  Bottom Layer w7: v1(404.85,2723.57) 523.83,2723.57 548.63,2748.37 744.13,2748.37
COMB3_DATA12: J3.35 | length 728.4
  Top Layer w7: v1(114.33,2684.2) 194.45,2684.2 J3.35@194.63,2684.2
  Bottom Layer w7: v1(114.33,2684.2) 222.3,2684.2 238.8,2700.37 423.63,2700.37 431.63,2708.7 528.97,2708.7 548.63,2728.37 744.13,2728.37
COMB3_DATA13: J3.36 | length 429.6
  Top Layer w7: J3.36@324.55,2684.2 452.87,2684.2 v1(453.63,2684.97)
  Bottom Layer w7: v1(453.63,2684.97) 525.23,2684.97 548.63,2708.37 744.13,2708.37
COMB3_DATA14: J3.37 | length 832.1
  Top Layer w7: v1(65.55,2644.07) 66.32,2644.83 194.45,2644.83 J3.37@194.63,2644.83
  Bottom Layer w7: v1(65.55,2644.07) 228.15,2644.07 252.78,2668.37 422.63,2668.37 429.63,2661.7 524.97,2661.7 552.63,2689.37 744.13,2689.37
COMB3_DATA15: J3.38 | length 428.5
  Top Layer w7: J3.38@324.55,2644.83 v1(404.85,2644.83)
  Bottom Layer w7: v1(404.85,2644.83) 536.1,2644.83 557.63,2666.37 744.13,2666.37
COMB4_DATA0: J3.3 | length 752.1
  Top Layer w7: v1(114.33,3314.07) 194.45,3314.07 J3.3@194.63,3314.07
  Bottom Layer w7: v1(114.33,3314.07) 129.63,3329.37 422.63,3329.37 508.63,3415.37 744.13,3415.37
COMB4_DATA1: J3.4 | length 452
  Top Layer w7: J3.4@324.55,3314.07 453.33,3314.07 453.63,3314.37 v1(454.63,3314.37)
  Bottom Layer w7: v1(454.63,3314.37) 532.63,3392.37 744.13,3392.37
COMB4_DATA2: J3.5 | length 856.2
  Top Layer w7: v1(65.55,3273.93) 66.32,3274.7 194.45,3274.7 J3.5@194.63,3274.7
  Bottom Layer w7: v1(65.55,3273.93) 142.2,3273.93 166.63,3298.37 416.63,3298.37 425.63,3289.37 466.63,3289.37 549.63,3372.37 744.13,3372.37
COMB4_DATA3: J3.6 | length 452.2
  Top Layer w7: J3.6@324.55,3274.7 v1(404.85,3274.7)
  Bottom Layer w7: v1(404.85,3274.7) 472.97,3274.7 551.63,3353.37 744.13,3353.37
COMB4_DATA4: J3.7 | length 751.5
  Top Layer w7: v1(114.33,3235.33) 194.45,3235.33 J3.7@194.63,3235.33
  Bottom Layer w7: v1(114.33,3235.33) 115.3,3234.37 145.63,3234.37 162.63,3251.37 423.63,3251.37 432.63,3260.37 482.63,3260.37 555.63,3333.37 744.13,3333.37
COMB4_DATA5: J3.8 | length 452.7
  Top Layer w7: J3.8@324.55,3235.33 452.67,3235.33 v1(453.63,3234.37)
  Bottom Layer w7: v1(453.63,3234.37) 476.63,3234.37 555.63,3313.37 744.13,3313.37
COMB4_DATA6: J3.9 | length 855.7
  Top Layer w7: v1(65.55,3195.2) 66.32,3195.97 194.45,3195.97 J3.9@194.63,3195.97
  Bottom Layer w7: v1(65.55,3195.2) 150.47,3195.2 174.63,3219.37 424.63,3219.37 432.63,3211.37 474.63,3211.37 557.63,3294.37 744.13,3294.37
COMB4_DATA7: J3.10 | length 451
  Top Layer w7: J3.10@324.55,3195.97 v1(404.85,3195.97)
  Bottom Layer w7: v1(404.85,3195.97) 405.25,3196.37 405.85,3196.37 406.45,3197.37 480.63,3197.37 554.63,3271.37 744.13,3271.37
COMB4_DATA8: J3.11 | length 736.8
  Top Layer w7: v1(114.33,3156.6) 194.45,3156.6 J3.11@194.63,3156.6
  Bottom Layer w7: v1(114.33,3156.6) 114.57,3156.37 130.57,3172.37 423.83,3172.37 434.63,3183 487.63,3183 524.63,3220.37 744.13,3220.37
COMB4_DATA9: J3.12 | length 437.9
  Top Layer w7: J3.12@324.55,3156.6 453.63,3156.6 454.03,3156.6 v1(453.63,3156)
  Bottom Layer w7: v1(453.63,3156) 454.03,3156.6 454.8,3157.37 484.63,3157.37 524.63,3197.37 744.13,3197.37
COMB4_DATA10: J3.13 | length 840.1
  Top Layer w7: v1(65.55,3116.47) 66.32,3117.23 194.45,3117.23 J3.13@194.63,3117.23
  Bottom Layer w7: v1(65.55,3116.47) 165.73,3116.47 189.63,3140.37 423.63,3140.37 432,3132 480.27,3132 525.63,3177.37 744.13,3177.37
COMB4_DATA11: J3.14 | length 436.6
  Top Layer w7: J3.14@324.55,3117.23 v1(404.85,3117.23)
  Bottom Layer w7: v1(404.85,3117.23) 485.5,3117.23 526.63,3158.37 744.13,3158.37
COMB4_DATA12: J3.15 | length 735.2
  Top Layer w7: v1(114.33,3077.87) 194.45,3077.87 J3.15@194.63,3077.87
  Bottom Layer w7: v1(114.33,3077.87) 174.13,3077.87 189.63,3093.37 422.63,3093.37 431.63,3102.37 490.63,3102.37 526.63,3138.37 744.13,3138.37
COMB4_DATA13: J3.16 | length 440.4
  Top Layer w7: J3.16@324.55,3077.87 v1@452.87,3077.87 ; v1@452.87,3077.87 453.63,3078.63 v1(454.63,3078.37) 453.83,3078.37 453.33,3077.87 v1@452.87,3077.87
  Bottom Layer w7: v1(454.63,3078.37) 453.63,3078.63 454.63,3078.63 488.9,3078.63 528.63,3118.37 744.13,3118.37
COMB4_DATA14: J3.17 | length 839.3
  Top Layer w7: v1(65.55,3037.73) 66.32,3038.5 194.45,3038.5 J3.17@194.63,3038.5
  Bottom Layer w7: v1(65.55,3037.73) 187,3037.73 211.63,3062.37 422.63,3062.37 429.63,3055.37 487.63,3055.37 531.63,3099.37 744.13,3099.37
COMB4_DATA15: J3.18 | length 435.3
  Top Layer w7: J3.18@324.55,3038.5 v1(404.85,3038.5)
  Bottom Layer w7: v1(404.85,3038.5) 492.77,3038.5 530.63,3076.37 744.13,3076.37
DAC1VREFOUTNC: 
DAC2VREFINNC: 
DAC3VREFINNC: 
DAC4VREFOUTNC: 
DEMODA_DATA0: 
DEMODA_DATA0: J5.3 | length 773.3
  Top Layer w7: v1(114.33,1869) 194.52,1869 J5.3@194.63,1869
  Bottom Layer w7: v1(114.33,1869) 129.63,1884.3 422.63,1884.3 434.3,1895.97 468.03,1895.97 593.63,1770.37 744.13,1770.37
DEMODA_DATA1: 
DEMODA_DATA1: J5.4 | length 470.2
  Top Layer w7: J5.4@324.55,1869 453.33,1869 453.63,1869.3 v1(454.63,1869.3)
  Bottom Layer w7: v1(454.63,1869.3) 474.7,1869.3 596.63,1747.37 744.13,1747.37
DEMODA_DATA2: 
DEMODA_DATA2: J5.5 | length 870.3
  Top Layer w7: v1(65.55,1828.87) 66.32,1829.63 194.52,1829.63 J5.5@194.63,1829.63
  Bottom Layer w7: v1(65.55,1828.87) 231.2,1828.87 255.63,1853.3 416.63,1853.3 425.63,1844.3 479.7,1844.3 596.63,1727.37 744.13,1727.37
DEMODA_DATA3: 
DEMODA_DATA3: J5.6 | length 469.8
  Top Layer w7: J5.6@324.55,1829.63 v1(404.85,1829.63)
  Bottom Layer w7: v1(404.85,1829.63) 474.37,1829.63 595.63,1708.37 744.13,1708.37
DEMODA_DATA4: 
DEMODA_DATA4: J5.7 | length 773.8
  Top Layer w7: v1(114.33,1790.27) 194.52,1790.27 J5.7@194.63,1790.27
  Bottom Layer w7: v1(114.33,1790.27) 115.3,1789.3 176.63,1789.3 186.63,1799.3 416.63,1799.3 432.63,1815.3 468.7,1815.3 595.63,1688.37 744.13,1688.37
DEMODA_DATA5: 
DEMODA_DATA5: J5.8 | length 324.4
  Top Layer w7: J5.8@324.55,1790.27 452.67,1790.27 v1(453.63,1789.3)
  Bottom Layer w7: v1(453.63,1789.3) 474.7,1789.3 597.63,1666.37
DEMODA_DATA6: 
DEMODA_DATA6: J5.9 | length 872.2
  Top Layer w7: v1(65.55,1750.13) 66.32,1750.9 194.52,1750.9 J5.9@194.63,1750.9
  Bottom Layer w7: v1(65.55,1750.13) 224.47,1750.13 251.63,1777.3 421.63,1777.3 432.63,1766.3 476.7,1766.3 593.63,1649.37 744.13,1649.37
DEMODA_DATA7: 
DEMODA_DATA7: J5.10 | length 472.3
  Top Layer w7: J5.10@324.55,1750.9 v1(404.85,1750.9)
  Bottom Layer w7: v1(404.85,1750.9) 406.45,1752.3 470.7,1752.3 596.63,1626.37 744.13,1626.37
DEMODA_DATA8: 
DEMODA_DATA8: J5.11 | length 672.4
  Top Layer w7: v1(114.33,1711.53) 194.52,1711.53 J5.11@194.63,1711.53
  Bottom Layer w7: v1(114.33,1711.53) 114.57,1711.3 164.63,1711.3 178.63,1725.3 423.63,1725.3 436.63,1738.3 464.7,1738.3 627.63,1575.37
DEMODA_DATA9: 
DEMODA_DATA9: J5.12 | length 372.6
  Top Layer w7: J5.12@324.55,1711.53 452.87,1711.53 v1(453.63,1712.3)
  Bottom Layer w7: v1(453.63,1712.3) 470.7,1712.3 630.63,1552.37
DEMODA_DATA10: 
DEMODA_DATA10: J5.13 | length 772.7
  Top Layer w7: v1(65.55,1671.4) 66.32,1672.17 194.52,1672.17 J5.13@194.63,1672.17
  Bottom Layer w7: v1(65.55,1671.4) 232.73,1671.4 257.63,1696.3 422.63,1696.3 429.63,1689.3 473.7,1689.3 630.63,1532.37
DEMODA_DATA11: 
DEMODA_DATA11: J5.14 | length 368.9
  Top Layer w7: J5.14@324.55,1672.17 v1(404.85,1672.17)
  Bottom Layer w7: v1(404.85,1672.17) 468.83,1672.17 627.63,1513.37
DEMODA_DATA12: 
DEMODA_DATA12: J5.15 | length 671.7
  Top Layer w7: v1(114.33,1632.8) 194.52,1632.8 J5.15@194.63,1632.8
  Bottom Layer w7: v1(114.33,1632.8) 166.13,1632.8 178.63,1645.3 419.63,1645.3 431.63,1657.3 463.7,1657.3 627.63,1493.37
DEMODA_DATA13: 
DEMODA_DATA13: J5.16 | length 361.8
  Top Layer w7: J5.16@324.55,1632.8 452.87,1632.8 v1(453.63,1633.57)
  Bottom Layer w7: v1(453.63,1633.57) 459.43,1633.57 619.63,1473.37
DEMODA_DATA14: 
DEMODA_DATA14: J5.17 | length 758.2
  Top Layer w7: v1(65.55,1592.67) 66.32,1593.43 194.52,1593.43 J5.17@194.63,1593.43
  Bottom Layer w7: v1(65.55,1592.67) 232,1592.67 256.63,1617.3 422.63,1617.3 429.63,1610.3 460.7,1610.3 616.63,1454.37
DEMODB_DATA0: 
DEMODB_DATA0: J3.50 | length 379.3
  Top Layer w7: J3.50@324.55,2408.63 453.33,2408.63 453.63,2408.93 v1(454.63,2408.93)
  Bottom Layer w7: v1(454.63,2408.93) 495.07,2408.93 642.63,2261.37
DEMODB_DATA1: 
DEMODB_DATA1: J3.51 | length 758.8
  Top Layer w7: v1@64.9,2369.27 v1(66.55,2369.27) 194.45,2369.27 J3.51@194.63,2369.27
  Bottom Layer w7: v1(66.55,2369.27) 369.98,2369.27 393.62,2393.13 422.63,2393.13 431.4,2384.37 499.63,2384.37 628.63,2255.37
DEMODB_DATA2: 
DEMODB_DATA2: J3.52 | length 339.7
  Top Layer w7: J3.52@324.55,2369.27 v1(404.85,2369.27)
  Bottom Layer w7: v1(404.85,2369.27) 494.73,2369.27 614.63,2249.37